# EAGLE board BatteryMonitor_Nutzen_ADS1115 (EAGLE 9.6.2)
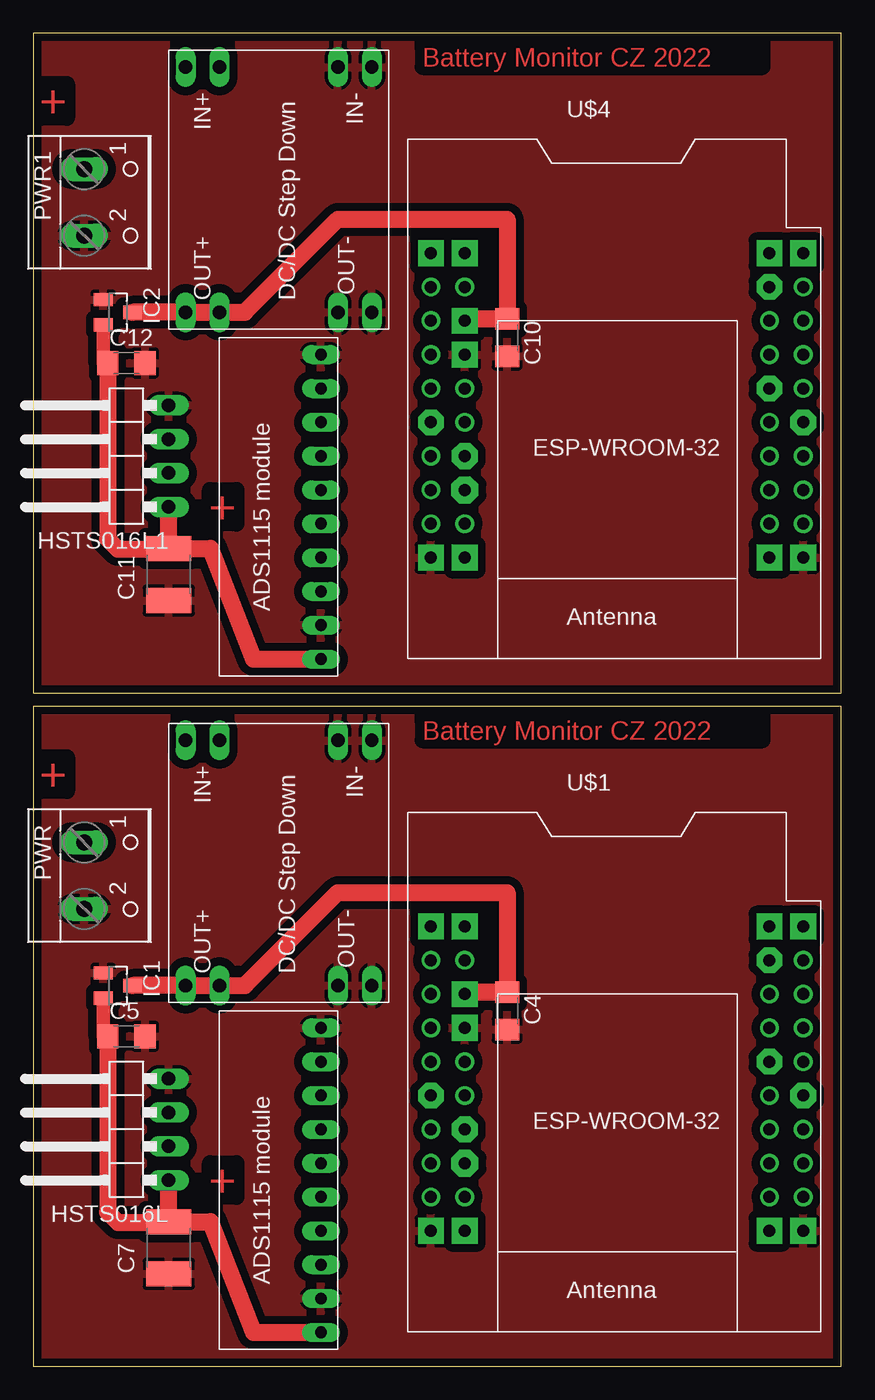
[diagram p0: board, top side]
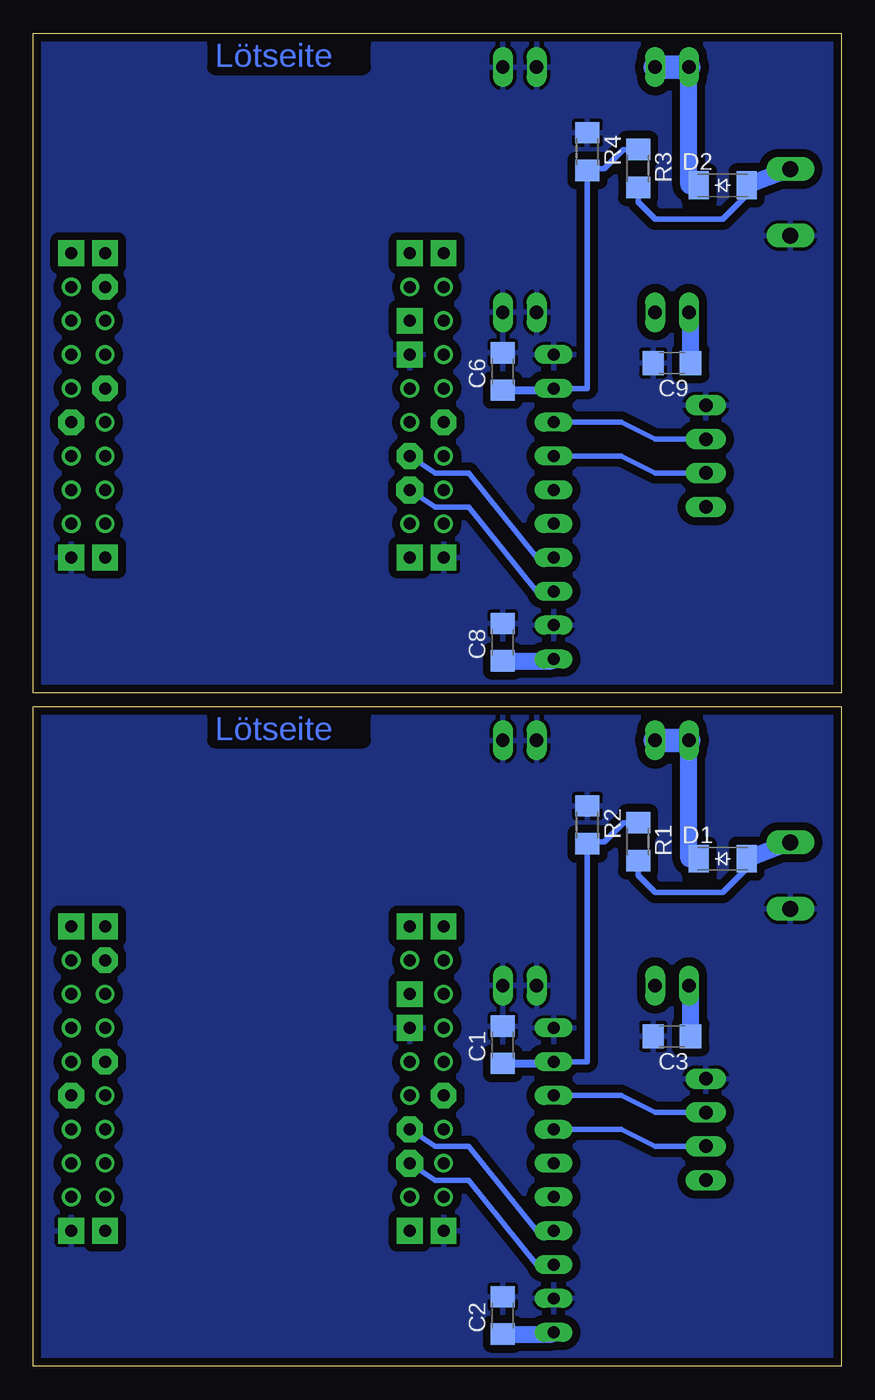
[diagram p1: board, bottom side, seen from below]

Size 60.63 x 100.07 mm. Coordinates in mm from the lower left corner, seen from the top.
Outline: 0,0 60.63,0 60.63,49.52 0,49.52 0,0
Outline: 0,50.55 60.63,50.55 60.63,100.07 0,100.07 0,50.55
Copper layers (1*16): Top 0.035mm / dielectric 1.5mm / Bottom 0.035mm
Design rules "default *": minimum track width 6mil, minimum drill 0.35mm, track to track 6mil, track to pad 6mil, pad to pad 6mil, via to via 6mil, smd to smd 6mil, copper to edge 20mil, drill to drill 6mil, minimum pad ring 10mil, minimum via ring 8mil, stop-mask expansion 4mil, vias tented up to drill 0mil, thermal gap 10mil

## Footprints (pad centres in the part's own frame; a part is rotated, then mirrored left to right if it is on the bottom)
C1206 = smd 1.6 x 1.8: 1 -1.4,0; 2 1.4,0
C4532 = smd 1.9 x 3.4: 1 -1.95,0; 2 1.95,0
SOD-123_MINI-SMA = smd 1.5 x 2.1: A 1.8,0; C -1.8,0
1X04/90 = drill 1.016 long: 1 -3.81,-3.81; 2 -1.27,-3.81; 3 1.27,-3.81; 4 3.81,-3.81
SOT23 = smd 1 x 1.4: 1 -0.95,-1.1; 2 0.95,-1.1; 3 0,1.1
W237-102 = drill 1.194 long: 1 -2.5,-1.27; 2 2.5,-1.27
R1206 = smd 1.6 x 1.803: 1 -1.422,0; 2 1.422,0
MH-ET_ESP32_D1_MINI = drill 0.9: 3V3 25.4,-5.08; IO0 0,-7.62; IO2 0,-5.08; IO4 0,-10.16; IO5 25.4,-7.62; IO16 2.54,-10.16; IO17 2.54,-12.7; IO18 25.4,-15.24; IO19 25.4,-12.7; IO25 0,-17.78; IO26 25.4,-17.78; IO27 0,-20.32; IO32 0,-15.24; IO34 27.94,-10.16; IO35 27.94,-15.24; NC 27.94,-20.32; NC2 27.94,-5.08; RXD 2.54,-20.32; SD1 0,-2.54; SD2 27.94,-2.54; SVN 27.94,-17.78; SVP 25.4,-20.32; TD0 2.54,-2.54; TMS 27.94,-7.62 | drill 0.9 pad 1.93 square: CLK 0,0; CMD 27.94,0; GND 0,-22.86; GND2 2.54,-7.62; GND3 27.94,-22.86; RST 25.4,-22.86; SD0 2.54,0; SD3 25.4,0; TXD 2.54,-22.86; VCC 2.54,-5.08 | drill 0.9 pad 1.93 octagon: IO21 2.54,-15.24; IO23 25.4,-10.16; IO33 27.94,-12.7; TCK 25.4,-2.54; TDI 0,-12.7 | drill 0.9 pad 2.032 octagon: IO22 2.54,-17.78
ADS1115 = drill 0.9 long: A0 -2.54,2.54; A1 -5.08,2.54; A2 -7.62,2.54; A3 -10.16,2.54; ADDR 2.54,2.54; ALERT 0,2.54; GND 10.16,2.54; SCA 5.08,2.54; SCL 7.62,2.54; VCC 12.7,2.54
DCDC-MINI = drill 1 long: 1 -8.89,3.81; 2 -8.89,1.27; 3 -8.89,-7.62; 4 -8.89,-10.16; 5 9.525,-10.16; 6 9.525,-7.62; 7 9.525,1.27; 8 9.525,3.81

## Placement (x,y rotation side)
C1  100n  [C1206]  25.4,24.13 90 bottom
C2  100n  [C1206]  25.4,3.81 90 bottom
C3  100n  [C1206]  12.7,24.77 180 bottom
C4  100n  [C1206]  35.56,26.67 270 top
C5  100n  [C1206]  6.99,24.77 0 top
C6  100n  [C1206]  25.4,74.68 90 bottom
C7  100n  [C4532]  10.16,8.89 90 top
C8  100n  [C1206]  25.4,54.36 90 bottom
C9  100n  [C1206]  12.7,75.31 180 bottom
C10  100n  [C1206]  35.56,77.22 270 top
C11  100n  [C4532]  10.16,59.44 90 top
C12  100n  [C1206]  6.99,75.31 0 top
D1  CGRM4001-G  [SOD-123_MINI-SMA]  8.89,38.1 0 bottom
D2  CGRM4001-G  [SOD-123_MINI-SMA]  8.89,88.65 0 bottom
HSTS016L  1  [1X04/90]  6.35,17.78 90 top
HSTS016L1  1  [1X04/90]  6.35,68.33 90 top
IC1  MCP1703CB  [SOT23]  6.35,28.57 270 top
IC2  MCP1703CB  [SOT23]  6.35,79.12 270 top
PWR  12V  [W237-102]  5.08,36.83 270 top
PWR1  12V  [W237-102]  5.08,87.38 270 top
R1  31k  [R1206]  15.24,39.37 270 bottom
R2  10k  [R1206]  19.05,40.64 270 bottom
R3  31k  [R1206]  15.24,89.92 270 bottom
R4  10k  [R1206]  19.05,91.19 270 bottom
U$1  MH-ET_ESP32_D1_MINI  [MH-ET_ESP32_D1_MINI]  29.84,33.02 0 top
U$2  ADS1115MINI-MODULE  [ADS1115]  19.05,15.24 270 top
U$3  DCDC-MINI  [DCDC-MINI]  21.59,38.1 270 top
U$4  MH-ET_ESP32_D1_MINI  [MH-ET_ESP32_D1_MINI]  29.84,83.57 0 top
U$5  ADS1115MINI-MODULE  [ADS1115]  19.05,65.79 270 top
U$6  DCDC-MINI  [DCDC-MINI]  21.59,88.65 270 top

## Library data of the parts
C1-C6 C8-C10 C12 = rcl
C7 C11 = resistor
D1 D2 = diode
HSTS016L HSTS016L1 = pinhead
IC1 IC2 = linear
PWR PWR1 = con-wago-500; MPN: 237-102; OC_FARNELL: unknown; OC_NEWARK: 70K9898; VIN: 12V
R1-R4 = eagle-ltspice; SPICEMODEL: NONE; SPICEPREFIX: R
U$1 U$4 = MH-ET_ESP32_D1_MINI
U$2 U$3 U$5 U$6 = monitor_components

## Nets
GND: C1.2 C2.2 C3.2 C4.2 C5.2 C7.1 HSTS016L.4 IC1.1 PWR.2 R2.1 U$1.GND U$1.GND2 U$1.GND3 U$2.A3 U$2.GND U$3.1 U$3.2 U$3.7 U$3.8
GND1: C6.2 C8.2 C9.2 C10.2 C11.1 C12.2 HSTS016L1.4 IC2.1 PWR1.2 R4.1 U$4.GND U$4.GND2 U$4.GND3 U$5.A3 U$5.GND U$6.1 U$6.2 U$6.7 U$6.8
N$1: D1.A PWR.1 R1.2
N$2: U$4.IO21 U$5.SCA
N$3: U$4.IO22 U$5.SCL
N$4: HSTS016L.2 U$2.A0
N$5: HSTS016L1.2 U$5.A0
N$6: HSTS016L.3 U$2.A1
N$7: U$1.IO21 U$2.SCA
N$8: U$1.IO22 U$2.SCL
N$9: C1.1 R1.1 R2.2 U$2.A2
N$10: HSTS016L1.3 U$5.A1
N$11: C6.1 R3.1 R4.2 U$5.A2
N$12: D2.A PWR1.1 R3.2
V1: D2.C U$6.3 U$6.4
V5.1: C9.1 C10.1 IC2.3 U$4.VCC U$6.5 U$6.6
V5.5: C3.1 C4.1 IC1.3 U$1.VCC U$3.5 U$3.6
V12: D1.C U$3.3 U$3.4
VCC: C2.1 C5.1 C7.2 HSTS016L.1 IC1.2 U$2.VCC
VCC1: C8.1 C11.2 C12.1 HSTS016L1.1 IC2.2 U$5.VCC

## Tracks (layer width: path | path; a pad name or v marks a point on that pad's centre or on a via)
GND
  pour Bottom (isolate 0.61): 0,49.53 60.96,49.53 60.96,0 0,0
  pour Top (isolate 0.61): 0,49.53 60.96,49.53 60.96,0 0,0
GND1
  pour Bottom (isolate 0.61): 0,100.08 60.96,100.08 60.96,50.55 0,50.55
  pour Top (isolate 0.61): 0,100.08 60.96,100.08 60.96,50.55 0,50.55
N$1
  Bottom 0.406: D1.A 7.09,37.36 8.89,35.56 13.97,35.56 15.24,36.83 R1.2
  Bottom 1.27: D1.A 3.85,39.37 PWR.1
N$2
  Bottom 0.406: U$4.IO21 30.48,67.06 27.94,67.06 22.86,60.71 U$5.SCA
N$3
  Bottom 0.406: U$4.IO22 30.48,64.52 27.94,64.52 22.86,58.17 U$5.SCL
N$4
  Bottom 0.406: HSTS016L.2 13.97,16.51 16.51,17.78 U$2.A0
N$5
  Bottom 0.406: HSTS016L1.2 13.97,67.06 16.51,68.33 U$5.A0
N$6
  Bottom 0.406: HSTS016L.3 13.97,19.05 16.51,20.32 U$2.A1
N$7
  Bottom 0.406: U$1.IO21 30.48,16.51 27.94,16.51 22.86,10.16 U$2.SCA
N$8
  Bottom 0.406: U$1.IO22 30.48,13.97 27.94,13.97 22.86,7.62 U$2.SCL
N$9
  Bottom 0.406: R1.1 16.36,40.79 17.78,39.37 18.9,39.37 | 18.9,39.37 R2.2 | 18.9,39.37 19.05,39.37 19.05,22.86 U$2.A2
  Bottom 0.61: C1.1 21.72,22.73 U$2.A2
N$10
  Bottom 0.406: HSTS016L1.3 13.97,69.6 16.51,70.87 U$5.A1
N$11
  Bottom 0.406: R3.1 16.36,91.34 17.78,89.92 18.9,89.92 | 18.9,89.92 R4.2 | 18.9,89.92 19.05,89.92 19.05,73.41 U$5.A2
  Bottom 0.61: C6.1 21.72,73.28 U$5.A2
N$12
  Bottom 0.406: D2.A 7.09,87.91 8.89,86.11 13.97,86.11 15.24,87.38 R3.2
  Bottom 1.27: D2.A 3.85,89.92 PWR1.1
V1
  Bottom 1.27: D2.C 11.43,88.65 U$6.4
  Bottom 1.778: U$6.4 U$6.3
V5.1
  Top 1.27: IC2.3 U$6.5 U$6.6 15.88,79.12 22.86,86.11 35.56,86.11 C10.1 33.15,78.62 U$4.VCC
  Bottom 1.27: C9.1 11.3,78.99 U$6.5
V5.5
  Top 1.27: IC1.3 U$3.5 U$3.6 15.88,28.57 22.86,35.56 35.56,35.56 C4.1 33.15,28.07 U$1.VCC
  Bottom 1.27: C3.1 11.3,28.45 U$3.5
V12
  Bottom 1.27: D1.C 11.43,38.1 U$3.4
  Bottom 1.778: U$3.4 U$3.3
VCC
  Top 1.016: C5.1 5.25,24.77 IC1.2
  Top 1.27: C7.2 13.29,10.84 16.51,2.54 U$2.VCC | C5.1 5.58,11.56 6.35,10.79 10.12,10.79 C7.2 | C7.2 HSTS016L.1
  Bottom 1.27: C2.1 21.72,2.41 U$2.VCC
VCC1
  Top 1.016: C12.1 5.25,75.31 IC2.2
  Top 1.27: C11.2 13.29,61.39 16.51,53.09 U$5.VCC | C12.1 5.58,62.11 6.35,61.34 10.12,61.34 C11.2 | C11.2 HSTS016L1.1
  Bottom 1.27: C8.1 21.72,52.96 U$5.VCC

## Text on the board
Top: Battery Monitor CZ 2022 | + | + | Battery Monitor CZ 2022 | + | +
Bottom: Lötseite | Lötseite